# Altium PCB Breakout_20pin.PcbDoc
Units mm, origin at the board's own origin, x right, y up, seen from the top; angles counter-clockwise.
Board outline 55 x 25 mm, 2 copper layers (Top Layer, Bottom Layer), stack 1.571 mm thick; 7 components, 20 nets, 68 pads, 0 vias.
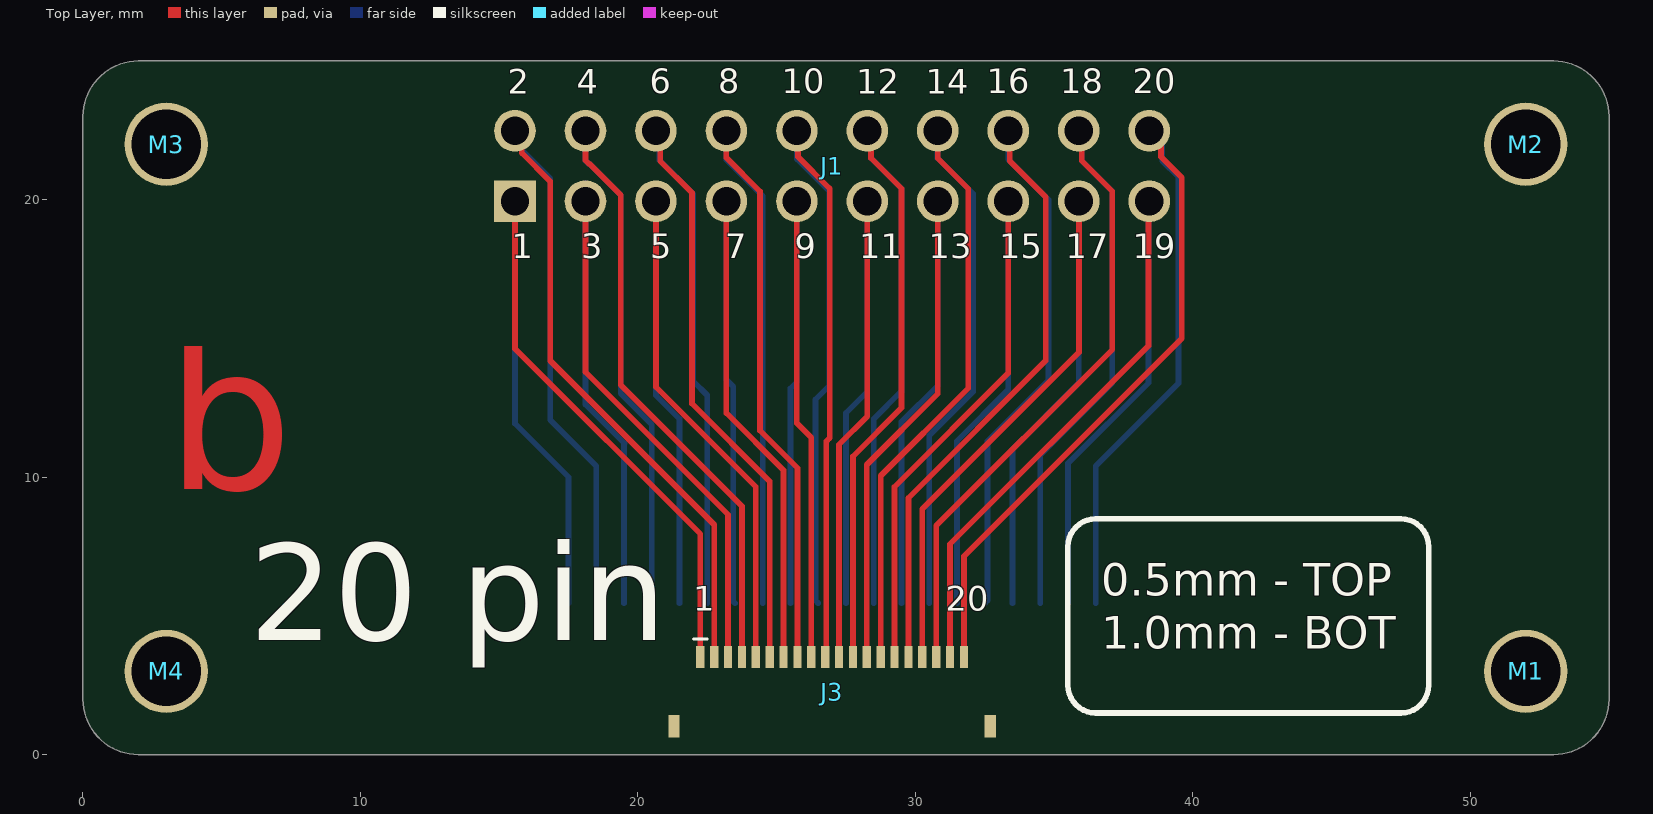
[diagram p0: Top Layer view]
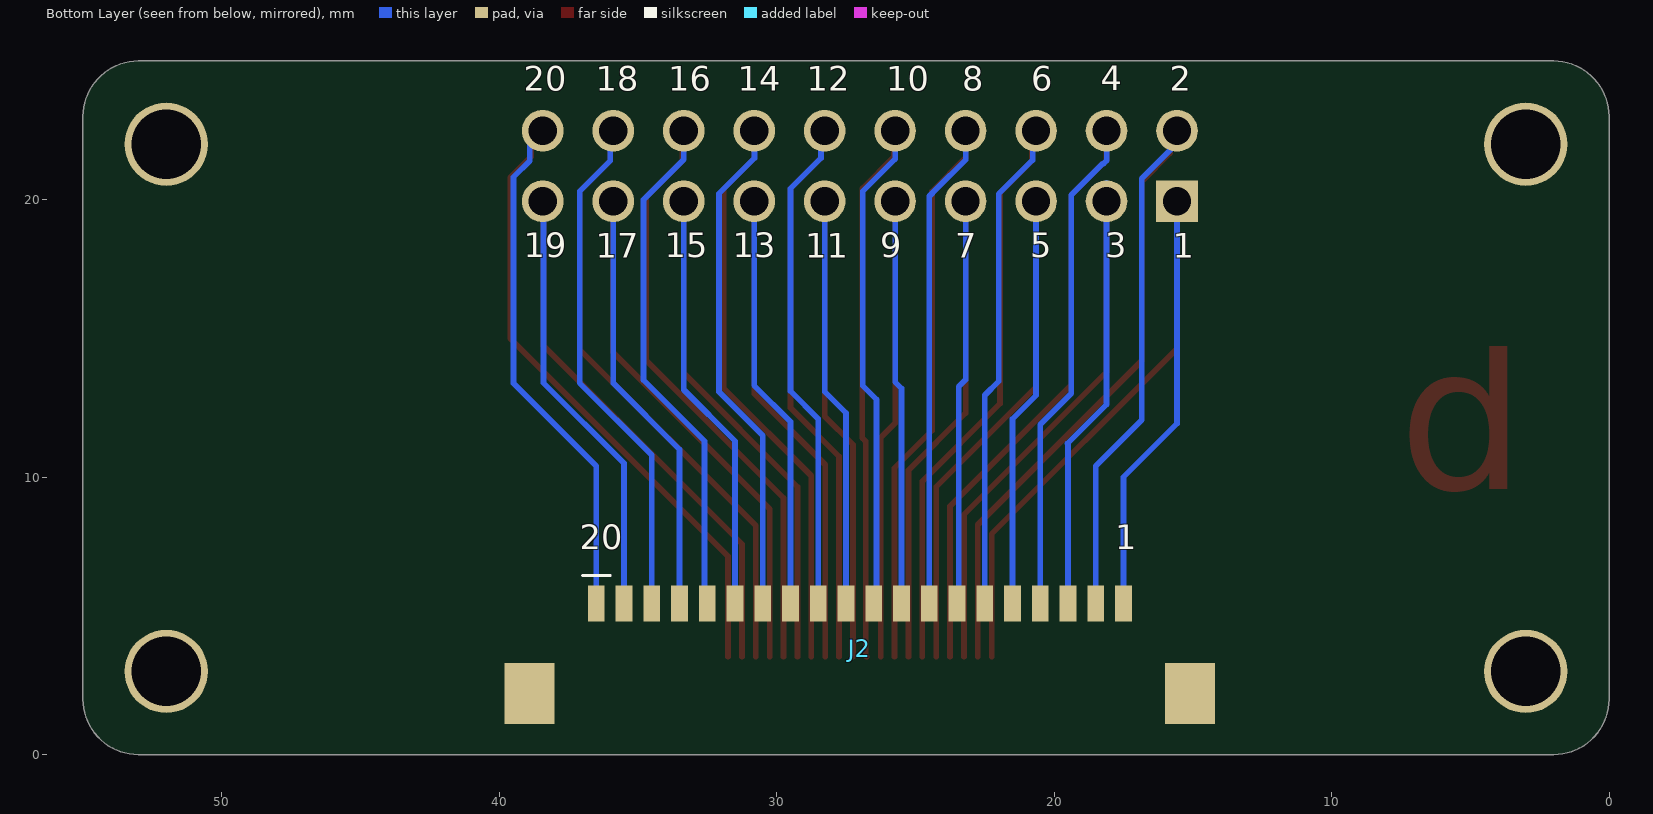
[diagram p1: Bottom Layer view, seen from below]

## Layer stack, top to bottom
Top Solder: solder mask 0.0102, Solder Resist, Dk 3.5
Top Layer: signal copper 0.0356
Dielectric 1: dielectric 1.5, FR-4, Dk 4.8
Bottom Layer: signal copper 0.0356
Bottom Solder: solder mask 0.0102, Solder Resist, Dk 3.5

## Board outline
2,0 cw(c2,2) 0,2 0,23 cw(c2,23) 2,25 53,25 cw(c53,23) 55,23 55,2 cw(c53,2) 53,0

## Design rules (kind name [scope] priority, off if disabled: settings)
Clearance [All] p1: gap=0.204 ignorepadtopadclearanceinfootprint=TRUE
DiffPairsRouting [All] p1: maxlimit=0.254 minlimit=0.064 mostfreqgap=0.127 toplayer_minwidth=0.178 toplayer_maxwidth=0.457 toplayer_prefwidth=0.457 bottomlayer_minwidth=0.178 bottomlayer_maxwidth=0.457 bottomlayer_prefwidth=0.457 impedanceprofiledriven=TRUE maxuncoupledlength=12.7
HoleSize [All] p1: absolutevalues=TRUE maxlimit=5 minlimit=0.153 maxpercent=80.000 minpercent=20.000
MinimumSolderMaskSliver [All] p1: minsoldermaskwidth=0.178
PolygonConnect [All] p1: connectstyle=Relief reliefconductorwidth=0.254 reliefentries=4 polygonreliefangle="90 Angle" airgapwidth=0.254
RoutingVias [All] p1: holewidth=0.305 width=0.61 viastyle="Through Hole" minholewidth=0.254 minwidth=0.508 maxholewidth=0.5 maxwidth=1.27
SolderMaskExpansion [All] p1: expansion=0.102 istentingtop=FALSE
Width [All] p1: maxlimit=25.4 minlimit=0.204 preferedwidth=0.254 minimp=50.000000 maximp=50.000000 favimp=50.000000
27 further rules are at their usual default settings.

## Components (designator, comment, footprint, x,y, rotation, side; value= is the part's Value field where it differs from the comment)
J1 "SBH11-PBPC-D10-ST-BK" HDR-V-2x10-KEYED 27,21.214 r0 top
J2 "XF3M(1)-2015-1B" CONN-FFC-H-20P-1MM 27,3.829 r180 bottom
J3 "FFC2B28-20-G" CONN-FFC-H-20P-0.5MM 27,2.272 r0 top
M1 "MTG_HOLE" MH_P_2.5MM 52,3 r90 top
M2 "MTG_HOLE" MH_P_2.5MM 52,22 r90 top
M3 "MTG_HOLE" MH_P_2.5MM 3,22 r90 top
M4 "MTG_HOLE" MH_P_2.5MM 3,3 r90 top

## Footprints (in the part's own frame and the unit in brackets; to place one, negate y for a bottom-side part, rotate by r counter-clockwise, add the part's x,y. Pads: shape width x height; smd on the part's side, far side on the other; paste and mask are expansions set on the pad)
CONN-FFC-H-20P-0.5MM [mm]
  rect 0.3x0.8 smd: 1(-4.75,1.25) 2(-4.25,1.25) 3(-3.75,1.25) 4(-3.25,1.25) 5(-2.75,1.25) 6(-2.25,1.25) 7(-1.75,1.25) 8(-1.25,1.25) 9(-0.75,1.25) 10(-0.25,1.25) 11(0.25,1.25) 12(0.75,1.25) 13(1.25,1.25) 14(1.75,1.25) 15(2.25,1.25) 16(2.75,1.25) 17(3.25,1.25) 18(3.75,1.25) 19(4.25,1.25) 20(4.75,1.25)
  rect 0.4x0.8 smd: ME1(-5.7,-1.25) ME2(5.7,-1.25)
  silkscreen extent -5,1.9 -4.5,1.9, body extent -6,-1.8 6,1.45, height 1.72
CONN-FFC-H-20P-1MM [mm]
  rect 0.6x1.3 smd: 1(-9.5,1.625) 2(-8.5,1.625) 3(-7.5,1.625) 4(-6.5,1.625) 5(-5.5,1.625) 6(-4.5,1.625) 7(-3.5,1.625) 8(-2.5,1.625) 9(-1.5,1.625) 10(-0.5,1.625) 11(0.5,1.625) 12(1.5,1.625) 13(2.5,1.625) 14(3.5,1.625) 15(4.5,1.625) 16(5.5,1.625) 17(6.5,1.625) 18(7.5,1.625) 19(8.5,1.625) 20(9.5,1.625)
  rect 1.8x2.2 smd: ME1(-11.9,-1.625) ME2(11.9,-1.625)
  silkscreen extent -10,2.63 -9,2.63, body extent -12.3,-3.68 12.3,2.73, height 2
HDR-V-2x10-KEYED [mm]
  round 1.5 hole 1.02: 1(11.43,1.27) 2(11.43,-1.27) 3(8.89,1.27) 4(8.89,-1.27) 5(6.35,1.27) 6(6.35,-1.27) 7(3.81,1.27) 8(3.81,-1.27) 9(1.27,1.27) 10(1.27,-1.27) 11(-1.27,1.27) 12(-1.27,-1.27) 13(-3.81,1.27) 14(-3.81,-1.27) 15(-6.35,1.27) 16(-6.35,-1.27) 17(-8.89,1.27) 18(-8.89,-1.27) 19(-11.43,1.27)
  rect 1.5x1.5 hole 1.02: 20(-11.43,-1.27)
  body extent -16.53,-4.75 16.53,4.42, height 9
MH_P_2.5MM [mm]
  round 3 hole 2.5: 1(0,0)

## Part data
J1: library part HDR-V-2x10-M, "CONN HEADER VERT 20POS 2.54MM", Color=Black, Manufacturer 1=Sullins, Package Quantity=1, Supplier Part Number 1=S9172-ND, ComponentLink1Description=https://datasheet.ciiva.com/730/sbh11-pbpc-dxx-st-xx-730919.pdf?src-supplier=Digi-Key, ComponentLink1URL=https://datasheet.ciiva.com/730/sbh11-pbpc-dxx-st-xx-730919.pdf?src-supplier=Digi-Key, Connector Type="Male Pin", Contact Plating=Gold, Lead Free="Lead Free", Manufacturer Part Number 1=SBH11-PBPC-D10-ST-BK, Mount="Through Hole", Number of Positions=20, Number of Rows=2, Packaging=Tray, Pitch=0.1inch, Pricing 1="1=0.54000, 10=0.51000, 100=0.39120, 500=0.34020, 1000=0.28067, 5000=0.24665, 10000=0.24570 (USD)", RoHS=Yes, Row Spacing=0.1inch, Stock 1=23438, Supplier 1=Digi-Key, Termination=Solder
J2: library part CONN-FFC-H-20P-1MM, "1.0-mm Pitch, Dual Contact ; For FPC/FFC, 20 Contacts, RoHS", Actuator Color=Black, Flammability Rating="UL94 V-0", Housing Color=Natural, Manufacturer 1=Omron, Max Operating Temperature=85°C, Min Operating Temperature=-30°C, Supplier Part Number=40AJ2875, Voltage Rating=50V, Actuator Material="Polymer,Liquid Crystal Polymer", Category="FFC / FPC", ComponentLink1Description=https://datasheet.ciiva.com/48563/en-xf3m-48563770.pdf?src-supplier=Avnet, ComponentLink1URL=https://datasheet.ciiva.com/48563/en-xf3m-48563770.pdf?src-supplier=Avnet, Contact Material="Copper Alloy", Contact Plating=Gold, Housing Material=Polymer, Manufacturer Part Number 1=XF3M(1)-2015-1B, Mating Cycles=20, Mounting Technology="Surface Mount", Number of Positions=20, Number of Rows=1, Orientation="Right Angle", Packaging="Cut Tape", Pitch=1mm, Pricing="1500=1.26 (USD)", RoHS=Yes, RoHS Compliant=Yes, Series=XF3M, Stock=4134, Supplier=Newark, Termination=Solder
J3: library part CONN-FFC-H-20P-0.5MM, "20W, 0.5MM Ffc Con, R/a, Dual Cont,", Manufacturer 1="Global Connector Technology", Supplier Part Number=90AJ6015, Category=Connectors, Manufacturer Part Number 1=FFC2B28-20-G, Pricing="1=0.812, 250=0.625, 500=0.563, 1000=0.511, 4000=0.511, 5000=0.468 (USD)", RoHS=No, Stock=4000, Supplier=Newark
M1 M2 M3 M4: "MTG HOLE PLATED VARIOUS SIZES"

## Nets (pads, with @x,y where several pads share a name; then routed paths per layer and width w, separated by ;. In a path a pad name is that pad's centre, name@x,y a point inside that pad or via, vN(x,y) a via of type N, cw(c..) or ccw(c..) an arc to the next point about the centre after c; other vN are vias at no path point)
1: J1.20 J2.20 J3.1 | length 34.5
  Top Layer w0.204: J1.20 15.57,14.63 22.25,7.95 J3.1
  Bottom Layer w0.204: J1.20 15.57,11.93 17.5,10 J2.20
2: J1.19 J2.19 J3.2 | length 40.2
  Top Layer w0.204: J1.19 15.818,22.236 15.818,21.682 16.84,20.66 16.84,14.194 22.75,8.284 J3.2
  Bottom Layer w0.204: J1.19 15.818,22.236 15.818,21.782 16.84,20.76 16.84,12.06 18.5,10.4 J2.19
3: J1.18 J2.18 J3.3 | length 34.3
  Top Layer w0.204: J1.18 18.11,13.79 23.25,8.65 J3.3
  Bottom Layer w0.204: J1.18@18.11,20.607 J1.18 18.11,12.621 19.515,11.215 19.5,11.2 J2.18
4: J1.17 J2.17 J3.4 | length 39.4
  Top Layer w0.204: J1.17 18.11,21.42 18.23,21.3 18.247,21.3 19.38,20.167 19.38,13.32 23.75,8.95 J3.4
  Bottom Layer w0.204: J1.17 18.1,22.474 18.1,21.42 18.22,21.3 18.247,21.3 19.38,20.167 19.38,19.944 19.38,13.02 20.5,11.9 J2.17
5: J1.16 J2.16 J3.5 | length 33.2
  Top Layer w0.204: J1.16 20.65,13.25 24.25,9.65 J3.5
  Bottom Layer w0.204: J1.16@20.65,20.35 J1.16 20.65,12.95 21.5,12.1 J2.16
6: J1.15 J2.15 J3.6 | length 38.5
  Top Layer w0.204: J1.15 20.8,22.334 20.8,21.4 21.95,20.25 21.95,12.65 24.75,9.85 J3.6
  Bottom Layer w0.204: J1.15 20.772,22.362 20.772,21.428 22,20.2 22,13.452 22.5,12.952 J2.15
7: J1.14 J2.14 J3.7 | length 32.3
  Top Layer w0.204: J1.14 23.19,12.31 25.25,10.25 J3.7
  Bottom Layer w0.204: J1.14@23.19,20.31 23.19,13.51 23.438,13.262 23.438,5.516 J2.14
8: J1.13 J2.13 J3.8 | length 37.6
  Top Layer w0.204: J1.13 23.19,21.51 24.4,20.3 24.4,11.677 25.75,10.327 J3.8
  Bottom Layer w0.204: J1.13 23.19,21.437 24.246,20.381 24.5,20.127 J2.13
9: J1.12 J2.12 J3.9 | length 31.9
  Top Layer w0.204: J1.12@25.73,20.27 25.73,11.945 26.25,11.425 J3.9
  Bottom Layer w0.204: J2.12 25.5,13.2 25.73,13.43 J1.12@25.73,20.27
10: J1.11 J2.11 J3.10 | length 37.3
  Top Layer w0.204: J1.11 25.767,22.447 25.767,21.547 26.91,20.405 26.91,11.412 26.794,11.296 26.794,3.566 J3.10
  Bottom Layer w0.204: J1.11 25.73,21.47 26.9,20.3 26.9,13.3 26.4,12.8 26.4,5.554 J2.11
11: J1.10 J2.10 J3.11 | length 32.4
  Top Layer w0.204: J3.11 27.25,11.175 28.27,12.195 J1.10@28.27,20.33
  Bottom Layer w0.204: J2.10 27.5,12.314 28.27,13.084 J1.10@28.27,20.33
12: J1.9 J2.9 J3.12 | length 38.1
  Top Layer w0.204: J3.12 27.75,10.75 29.5,12.5 29.5,20.4 28.4,21.5 28.4,22.354 J1.9
  Bottom Layer w0.204: J1.9 28.4,22.354 28.4,21.5 29.5,20.4 29.5,13.1 28.5,12.1 J2.9
13: J1.8 J2.8 J3.13 | length 33
  Top Layer w0.204: J3.13 28.25,10.45 30.81,13.01 J1.8@30.81,20.19
  Bottom Layer w0.204: J2.8 29.5,12 30.81,13.31 J1.8@30.81,20.19
14: J1.7 J2.7 J3.14 | length 38.9
  Top Layer w0.204: J3.14 28.75,10.05 31.9,13.2 31.9,20.4 30.81,21.49 J1.7
  Bottom Layer w0.204: J2.7 30.5,11.5 32.08,13.08 32.08,20.22 30.8,21.5 30.8,22.474 J1.7
15: J1.6 J2.6 J3.15 | length 33.9
  Top Layer w0.204: J3.15 29.25,9.65 33.35,13.75 J1.6@33.35,20.25
  Bottom Layer w0.204: J2.6 31.5,11.3 33.35,13.15 J1.6@33.35,20.167
16: J1.5 J2.5 J3.16 | length 40.2
  Top Layer w0.204: J3.16 29.75,9.25 34.7,14.2 34.7,20.1 33.4,21.4 33.4,22.434 J1.5
  Bottom Layer w0.204: J2.5 32.6,5.554 32.6,11.3 34.8,13.5 34.8,20 33.35,21.45 J1.5
17: J1.4 J2.4 J3.17 | length 34.8
  Top Layer w0.204: J3.17 30.25,8.85 35.9,14.5 J1.4@35.9,20.2
  Bottom Layer w0.204: J2.4 33.5,11 35.89,13.39 J1.4 J1.4@35.89,20.21
18: J1.3 J2.3 J3.18 | length 40.7
  Top Layer w0.204: J3.18 30.75,8.25 37.1,14.6 37.1,20.3 36,21.4 36,22.374 J1.3
  Bottom Layer w0.204: J2.3 34.5,10.8 37.1,13.4 37.1,20.3 36,21.4 36,22.374 J1.3
19: J1.2 J2.2 J3.19 | length 35.7
  Top Layer w0.204: J3.19 31.25,7.587 38.4,14.737 J1.2@38.4,20.2
  Bottom Layer w0.204: J2.2 35.5,10.5 38.4,13.4 J1.2@38.4,20.268
20: J1.1 J2.1 J3.20 | length 41.4
  Top Layer w0.204: J3.20 31.75,7.15 39.6,15 39.6,20.8 38.853,21.547 38.853,22.061 J1.1
  Bottom Layer w0.204: J2.1 36.5,10.4 39.486,13.386 39.486,20.814 38.9,21.4 38.9,22.014 J1.1
pads on no net: J2.ME1 J2.ME2 J3.ME1 J3.ME2 M1.1 M2.1 M3.1 M4.1

## Other copper
Top Layer:
  text "b" at 3,7.5 h11

## Silkscreen, mask and mechanical layers (free items; w line width, h text height)
Top Overlay:
  lines w0.2: 35.5,2.5 ccw(c36.5,2.5) 36.5,1.5 47.5,1.5 ccw(c47.5,2.5) 48.5,2.5 48.5,7.5 ccw(c47.5,7.5) 47.5,8.5 36.5,8.5 ccw(c36.5,7.5) 35.5,7.5 35.5,2.5 ; 35.5,2.5 35.5,2.5
  text "6" at 20.434,23.545 h1.5
  text "8" at 22.892,23.545 h1.5
  text "10" at 25.192,23.545 h1.5
  text "16" at 32.578,23.545 h1.5
  text "18" at 35.228,23.545 h1.5
  text "20" at 37.827,23.545 h1.5
  text "2" at 15.317,23.529 h1.5
  text "4" at 17.797,23.529 h1.5
  text "12" at 27.878,23.529 h1.5
  text "14" at 30.378,23.529 h1.5
  text "1" at 15.45,17.593 h1.5
  text "3" at 17.95,17.609 h1.5
  text "5" at 20.45,17.609 h1.5
  text "7" at 23.15,17.593 h1.5
  text "9" at 25.65,17.609 h1.5
  text "11" at 27.978,17.593 h1.5
  text "13" at 30.478,17.609 h1.5
  text "15" at 33.028,17.609 h1.5
  text "17" at 35.428,17.593 h1.5
  text "19" at 37.828,17.609 h1.5
  text "0.5mm - TOP" at 36.7,5.338 h2
  text "1" at 22,4.9 h1.5
  text "20" at 31.099,4.899 h1.5
  text "1.0mm - BOT" at 36.7,3.421 h2
  text "20 pin" at 5.996,2.968 h6
  text "c" at 3.169,-11.943 h50
Bottom Overlay:
  text "2" at 15.837,23.646 h1.5
  text "4" at 18.319,23.65 h1.5
  text "6" at 20.832,23.645 h1.5
  text "8" at 23.314,23.645 h1.5
  text "10" at 26.054,23.645 h1.5
  text "12" at 28.923,23.646 h1.5
  text "14" at 31.4,23.646 h1.5
  text "16" at 33.9,23.645 h1.5
  text "18" at 36.528,23.645 h1.5
  text "20" at 39.121,23.645 h1.5
  text "3" at 18.149,17.645 h1.5
  text "5" at 20.853,17.645 h1.5
  text "9" at 26.263,17.645 h1.5
  text "13" at 31.59,17.645 h1.5
  text "15" at 34.028,17.645 h1.5
  text "19" at 39.12,17.645 h1.5
  text "1" at 15.72,17.629 h1.5
  text "7" at 23.566,17.629 h1.5
  text "11" at 28.97,17.629 h1.5
  text "17" at 36.528,17.629 h1.5
  text "1" at 17.8,7.117 h1.5
  text "20" at 37.101,7.116 h1.5
Board Outline:
  lines w0.1: 27,25 27.5,25 ; 0,2 ccw(c2,2) 2,0 53,0 ccw(c53,2) 55,2 55,23 ccw(c53,23) 53,25 2,25 ccw(c2,23) 0,23 0,2